# Altium PCB JacdacBreadboardRingsWasherG 109 oblong-panel.PcbDoc
Units mm, origin at the board's own origin, x right, y up, seen from the top; angles counter-clockwise.
Board outline 71 x 72 mm, 2 copper layers (Top Layer, Bottom Layer), stack 1.971 mm thick; 4 components, 0 nets, 4 pads, 0 vias.
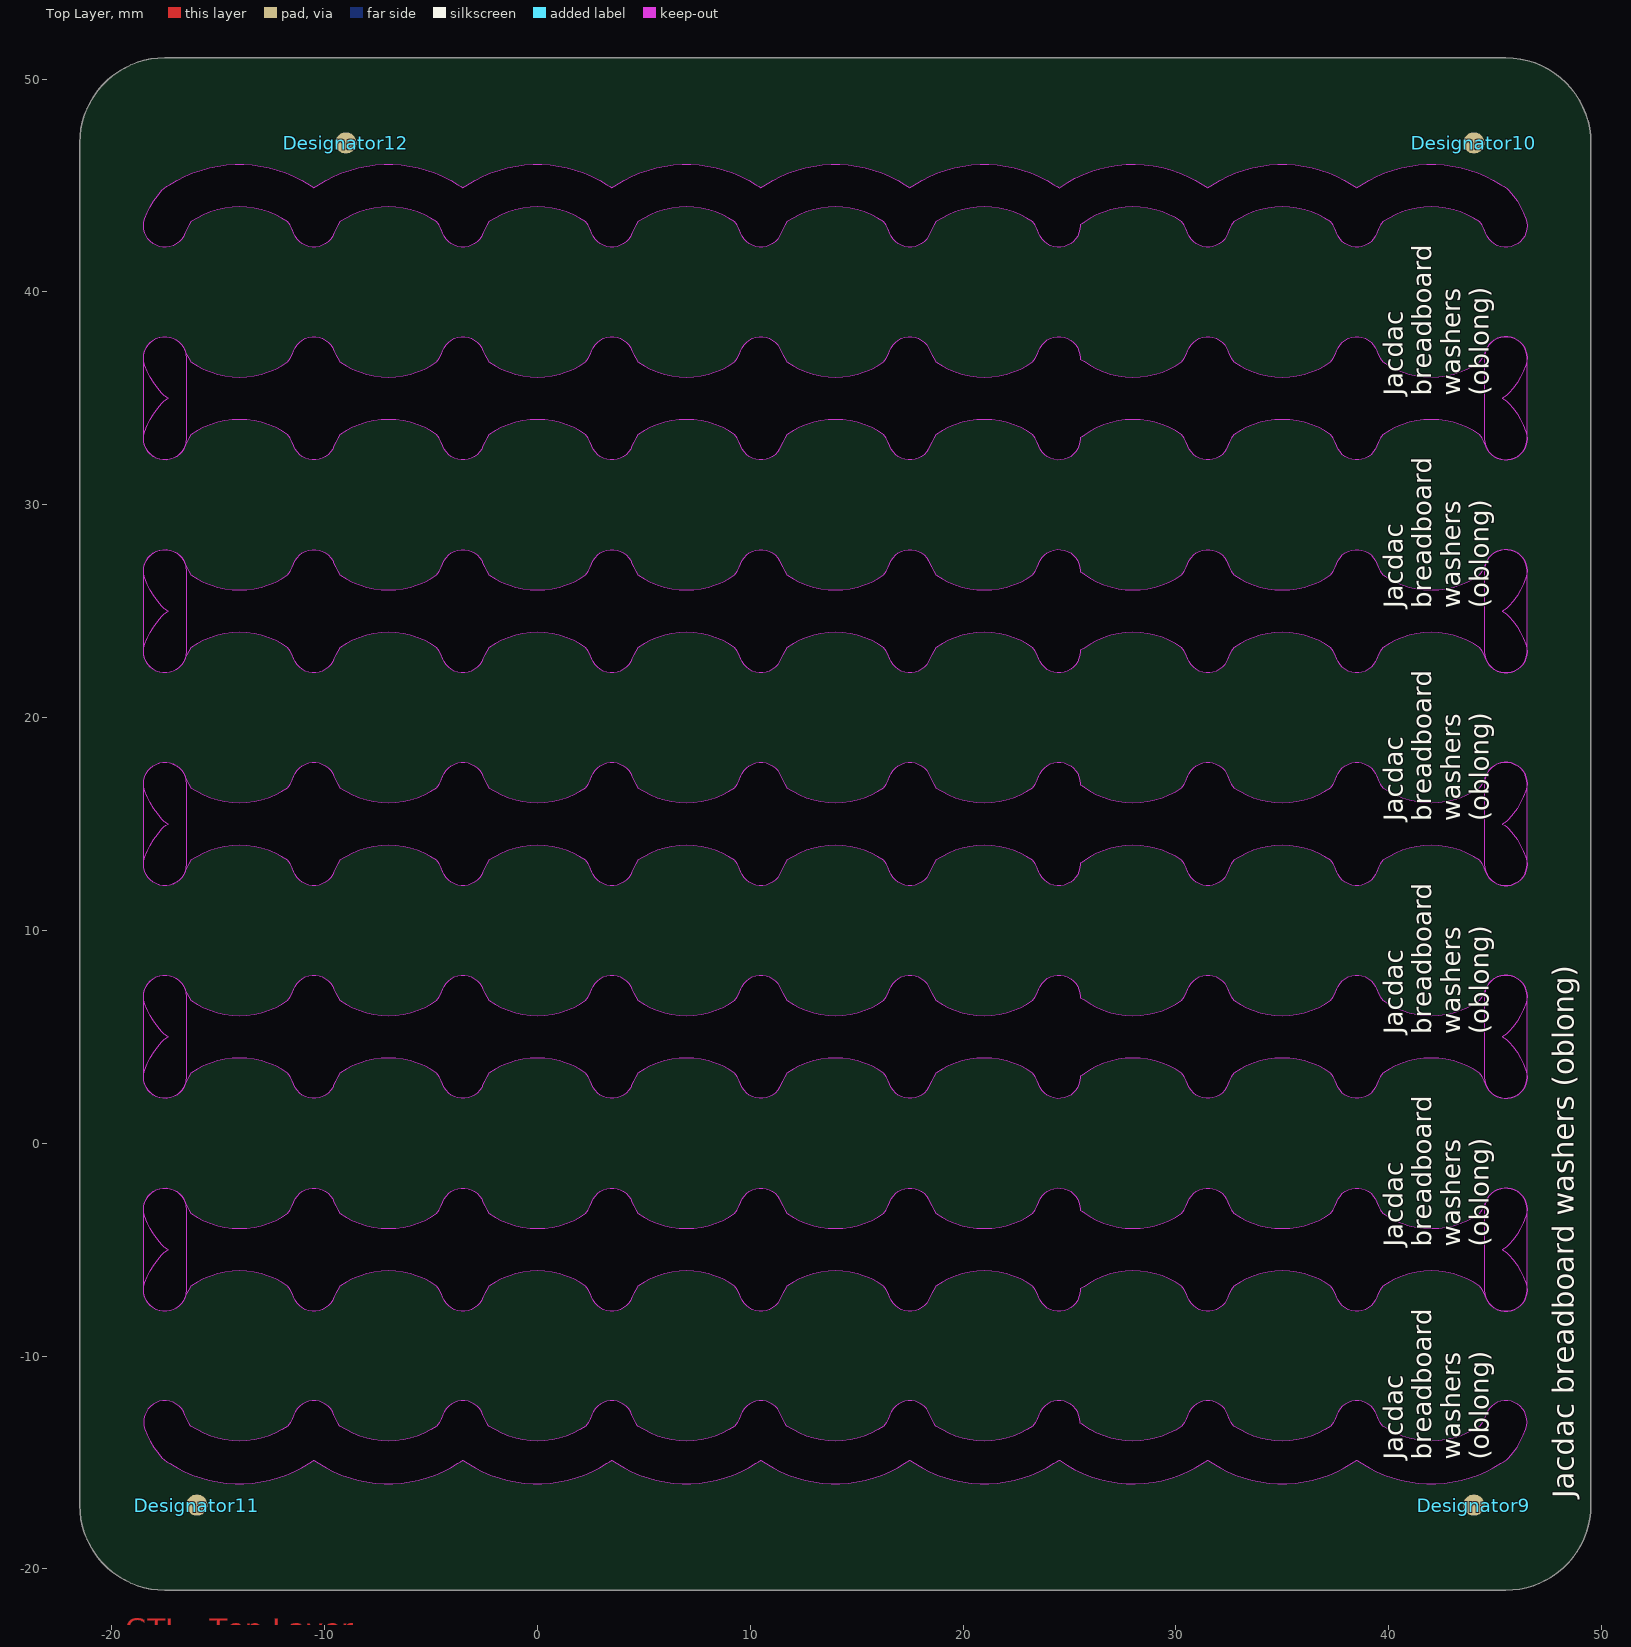
[diagram p0: Top Layer view]
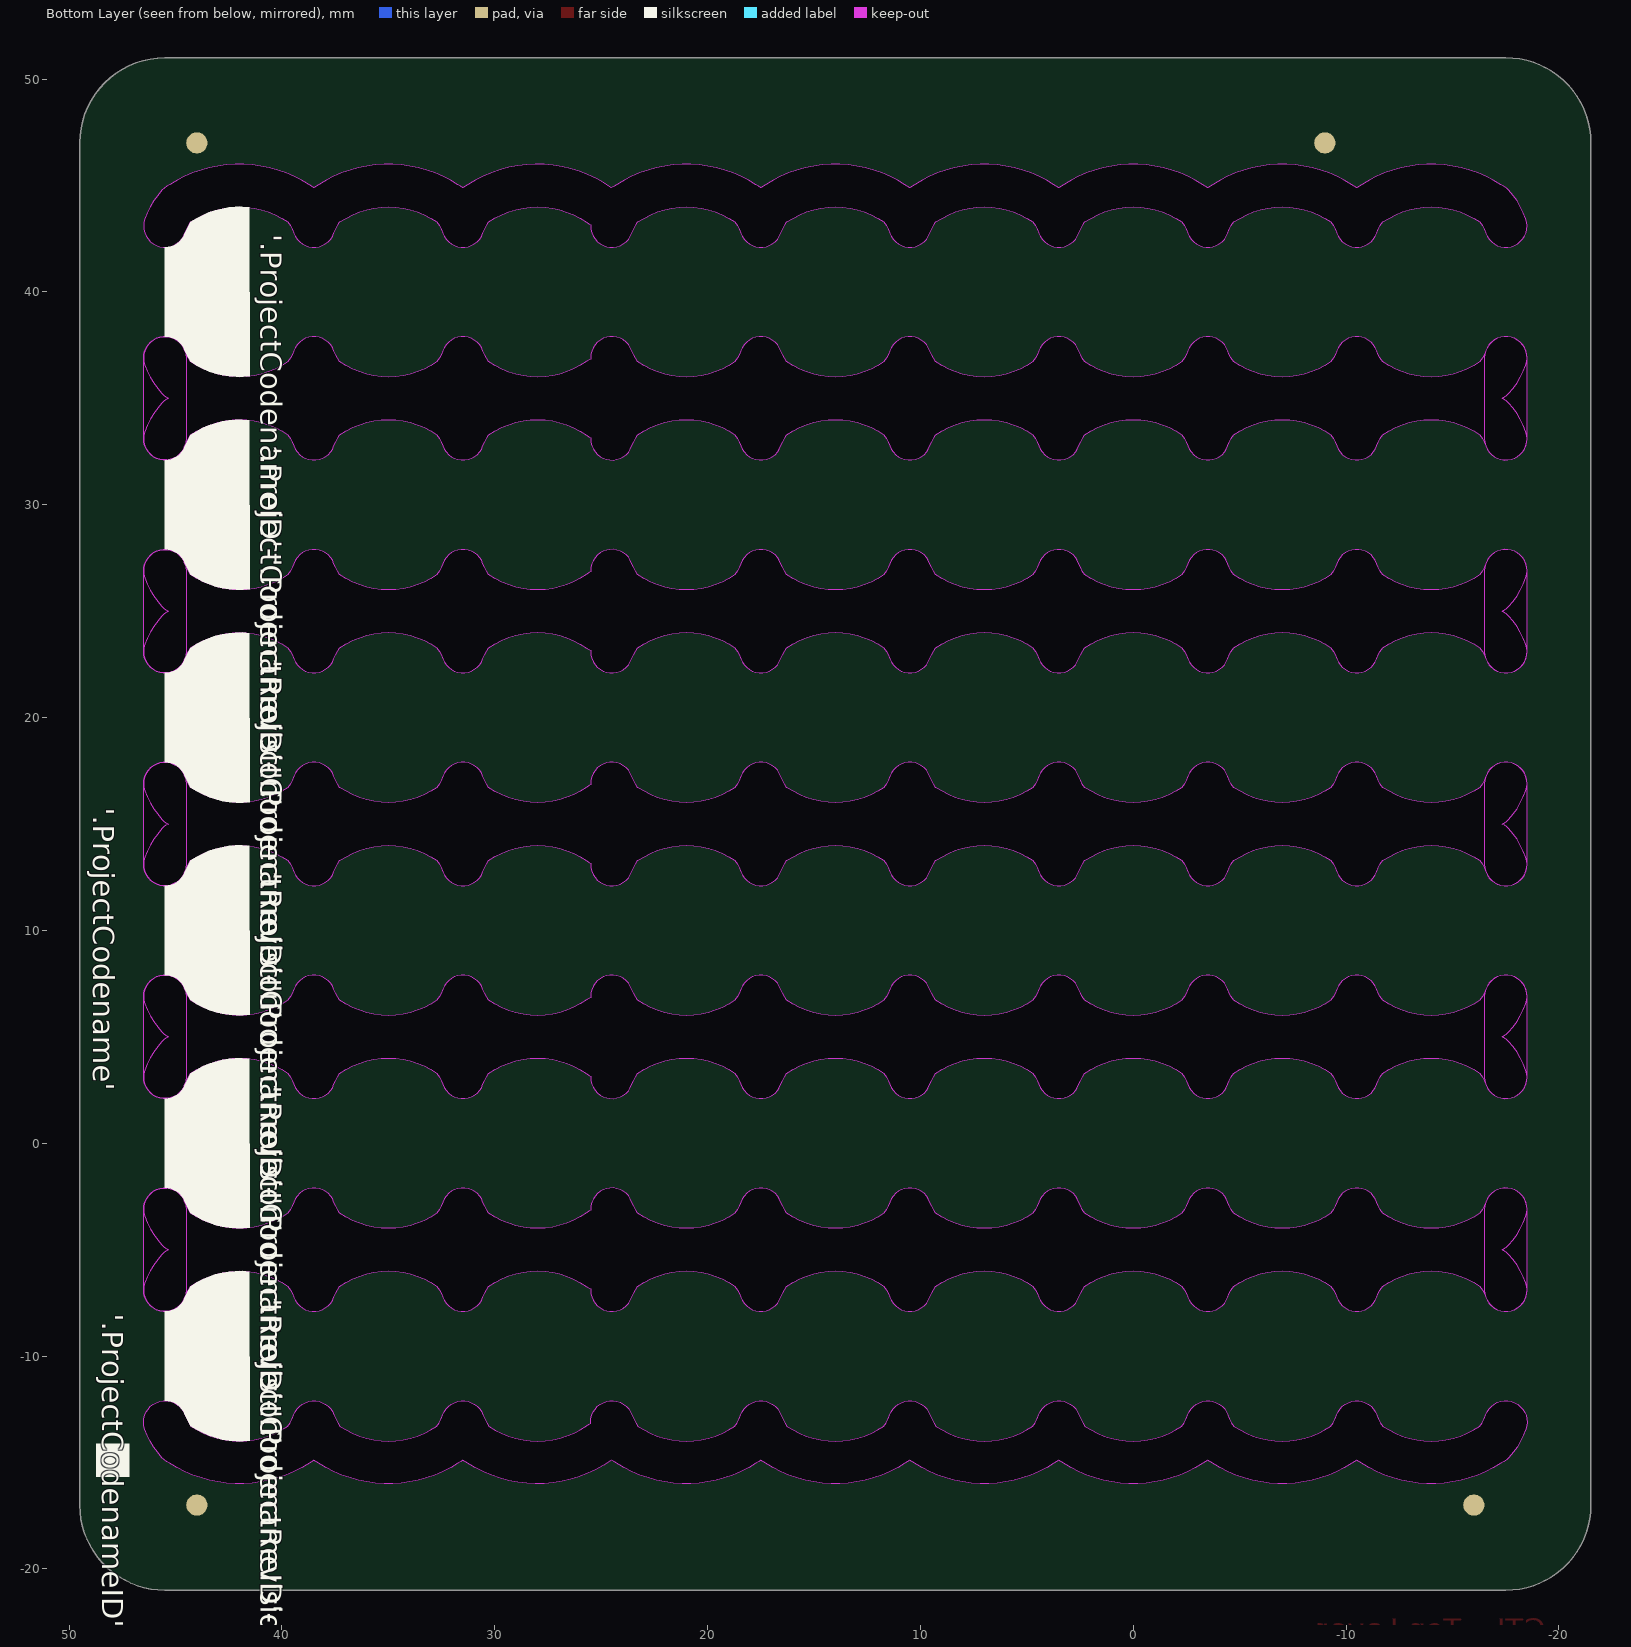
[diagram p1: Bottom Layer view, seen from below]

## Layer stack, top to bottom
Top Solder: solder mask 0.0102, Solder Resist, Dk 3.5
Top Layer: signal copper 0.0356
Dielectric 1: dielectric 1.9, FR-4, Dk 4.8
Bottom Layer: signal copper 0.0356
Bottom Solder: solder mask 0.0102, Solder Resist, Dk 3.5

## Board outline
-21.5,-17 -21.5,47 cw(c-17.5,47) -17.5,51 45.5,51 cw(c45.5,47) 49.5,47 49.5,-17 cw(c45.5,-17) 45.5,-21 -17.5,-21 cw(c-17.5,-17)
cut-out: -17.27,45.031 cw(c-14,40) -10.73,45.031 cw(c-11.097,44.1) -10.5,44.903 cw(c-9.903,44.1) -10.27,45.031 cw(c-7,40) -3.73,45.031 cw(c-4.097,44.1) -3.5,44.903 cw(c-2.903,44.1) -3.27,45.031 cw(c0,40) 3.27,45.031 cw(c2.903,44.1) 3.5,44.903 cw(c4.097,44.1) 3.73,45.031 cw(c7,40) 10.27,45.031 cw(c9.903,44.1) 10.5,44.903 cw(c11.097,44.1) 10.73,45.031 cw(c14,40) 17.27,45.031 cw(c16.903,44.1) 17.5,44.903 cw(c18.097,44.1) 17.73,45.031 cw(c21,40) 24.27,45.031 cw(c23.903,44.1) 24.52,44.888 24.533,44.897 cw(c28,40) 31.27,45.031 cw(c30.903,44.1) 31.5,44.903 cw(c32.097,44.1) 31.73,45.031 cw(c35,40) 38.27,45.031 cw(c37.903,44.1) 38.5,44.903 cw(c39.097,44.1) 38.73,45.031 cw(c42,40) 45.27,45.031 cw(c44.903,44.1) 45.647,44.77 cw(c42.674,42.093) 46.442,43.436 cw(c45.5,43.1) 46.5,43.1 cw(c45.5,43.1) 44.558,42.764 ccw(c42.674,42.093) 44.277,43.288 ccw(c42,40) 39.723,43.288 ccw(c41.326,42.093) 39.442,42.764 cw(c38.5,43.1) 37.558,42.764 ccw(c35.674,42.093) 37.277,43.288 ccw(c35,40) 32.723,43.288 ccw(c34.326,42.093) 32.442,42.764 cw(c31.5,43.1) 30.558,42.764 ccw(c28.674,42.093) 30.277,43.288 ccw(c28,40) 25.689,43.264 cw(c25.111,44.08) 25.499,43.159 25.5,43.1 cw(c24.5,43.1) 23.558,42.764 ccw(c21.674,42.093) 23.277,43.288 ccw(c21,40) 18.723,43.288 ccw(c20.326,42.093) 18.442,42.764 cw(c17.5,43.1) 16.558,42.764 ccw(c14.674,42.093) 16.277,43.288 ccw(c14,40) 11.723,43.288 ccw(c13.326,42.093) 11.442,42.764 cw(c10.5,43.1) 9.558,42.764 ccw(c7.674,42.093) 9.277,43.288 ccw(c7,40) 4.723,43.288 ccw(c6.326,42.093) 4.442,42.764 cw(c3.5,43.1) 2.558,42.764 ccw(c0.674,42.093) 2.277,43.288 ccw(c0,40) -2.277,43.288 ccw(c-0.674,42.093) -2.558,42.764 cw(c-3.5,43.1) -4.442,42.764 ccw(c-6.326,42.093) -4.723,43.288 ccw(c-7,40) -9.277,43.288 ccw(c-7.674,42.093) -9.558,42.764 cw(c-10.5,43.1) -11.442,42.764 ccw(c-13.326,42.093) -11.723,43.288 ccw(c-14,40) -16.277,43.288 ccw(c-14.674,42.093) -16.558,42.764 cw(c-17.5,43.1) -18.442,43.436 cw(c-14.674,42.093) -17.647,44.77 cw(c-16.903,44.1)
cut-out: -18.5,33.1 -18.5,36.9 cw(c-17.5,36.9) -16.5,36.9 -16.5,33.1 cw(c-17.5,33.1)
cut-out: 46.5,33.1 46.5,36.9 ccw(c45.5,36.9) 44.499,36.9 44.499,33.1 ccw(c45.5,33.1)
cut-out: -11.442,32.764 ccw(c-13.326,32.093) -11.723,33.288 ccw(c-14,30) -16.277,33.288 ccw(c-14.674,32.093) -16.558,32.764 cw(c-17.5,33.1) -18.442,33.436 cw(c-14.674,32.093) -17.647,34.77 cw(c-16.903,34.1) -17.341,35 cw(c-16.903,35.9) -17.647,35.23 cw(c-14.674,37.907) -18.442,36.564 cw(c-17.5,36.9) -16.558,37.236 ccw(c-14.674,37.907) -16.277,36.712 ccw(c-14,40) -11.723,36.712 ccw(c-13.326,37.907) -11.442,37.236 cw(c-10.5,36.9) -9.558,37.236 ccw(c-7.674,37.907) -9.277,36.712 ccw(c-7,40) -4.723,36.712 ccw(c-6.326,37.907) -4.442,37.236 cw(c-3.5,36.9) -2.558,37.236 ccw(c-0.674,37.907) -2.277,36.712 ccw(c0,40) 2.277,36.712 ccw(c0.674,37.907) 2.558,37.236 cw(c3.5,36.9) 4.442,37.236 ccw(c6.326,37.907) 4.723,36.712 ccw(c7,40) 9.277,36.712 ccw(c7.674,37.907) 9.558,37.236 cw(c10.5,36.9) 11.442,37.236 ccw(c13.326,37.907) 11.723,36.712 ccw(c14,40) 16.277,36.712 ccw(c14.674,37.907) 16.558,37.236 cw(c17.5,36.9) 18.442,37.236 ccw(c20.326,37.907) 18.723,36.712 ccw(c21,40) 23.277,36.712 ccw(c21.674,37.907) 23.558,37.236 cw(c24.5,36.9) 25.5,36.9 25.499,36.841 cw(c25.111,35.92) 25.689,36.736 ccw(c28,40) 30.277,36.712 ccw(c28.674,37.907) 30.558,37.236 cw(c31.5,36.9) 32.442,37.236 ccw(c34.326,37.907) 32.723,36.712 ccw(c35,40) 37.277,36.712 ccw(c35.674,37.907) 37.558,37.236 cw(c38.5,36.9) 39.442,37.236 ccw(c41.326,37.907) 39.723,36.712 ccw(c42,40) 44.277,36.712 ccw(c42.674,37.907) 44.558,37.236 cw(c45.5,36.9) 46.5,36.9 cw(c45.5,36.9) 46.442,36.564 cw(c42.674,37.907) 45.647,35.23 cw(c44.903,35.9) 45.341,35 cw(c44.903,34.1) 45.647,34.77 cw(c42.674,32.093) 46.442,33.436 cw(c45.5,33.1) 46.5,33.1 cw(c45.5,33.1) 44.558,32.764 ccw(c42.674,32.093) 44.277,33.288 ccw(c42,30) 39.723,33.288 ccw(c41.326,32.093) 39.442,32.764 cw(c38.5,33.1) 37.558,32.764 ccw(c35.674,32.093) 37.277,33.288 ccw(c35,30) 32.723,33.288 ccw(c34.326,32.093) 32.442,32.764 cw(c31.5,33.1) 30.558,32.764 ccw(c28.674,32.093) 30.277,33.288 ccw(c28,30) 25.689,33.264 cw(c25.111,34.081) 25.499,33.159 25.5,33.1 cw(c24.5,33.1) 23.558,32.764 ccw(c21.674,32.093) 23.277,33.288 ccw(c21,30) 18.723,33.288 ccw(c20.326,32.093) 18.442,32.764 cw(c17.5,33.1) 16.558,32.764 ccw(c14.674,32.093) 16.277,33.288 ccw(c14,30) 11.723,33.288 ccw(c13.326,32.093) 11.442,32.764 cw(c10.5,33.1) 9.558,32.764 ccw(c7.674,32.093) 9.277,33.288 ccw(c7,30) 4.723,33.288 ccw(c6.326,32.093) 4.442,32.764 cw(c3.5,33.1) 2.558,32.764 ccw(c0.674,32.093) 2.277,33.288 ccw(c0,30) -2.277,33.288 ccw(c-0.674,32.093) -2.558,32.764 cw(c-3.5,33.1) -4.442,32.764 ccw(c-6.326,32.093) -4.723,33.288 ccw(c-7,30) -9.277,33.288 ccw(c-7.674,32.093) -9.558,32.764 cw(c-10.5,33.1)
cut-out: -18.5,13.1 -18.5,16.9 cw(c-17.5,16.9) -16.5,16.9 -16.5,13.1 cw(c-17.5,13.1)
cut-out: -18.5,23.1 -18.5,26.9 cw(c-17.5,26.9) -16.5,26.9 -16.5,23.1 cw(c-17.5,23.1)
cut-out: 46.5,23.1 46.5,26.9 ccw(c45.5,26.9) 44.499,26.9 44.499,23.1 ccw(c45.5,23.1)
cut-out: 46.5,13.1 46.5,16.9 ccw(c45.5,16.9) 44.499,16.9 44.499,13.1 ccw(c45.5,13.1)
cut-out: -11.442,12.764 ccw(c-13.326,12.093) -11.723,13.288 ccw(c-14,10) -16.277,13.288 ccw(c-14.674,12.093) -16.558,12.764 cw(c-17.5,13.1) -18.442,13.436 cw(c-14.674,12.093) -17.647,14.77 cw(c-16.903,14.1) -17.341,15 cw(c-16.903,15.9) -17.647,15.23 cw(c-14.674,17.907) -18.442,16.564 cw(c-17.5,16.9) -16.558,17.236 ccw(c-14.674,17.907) -16.277,16.712 ccw(c-14,20) -11.723,16.712 ccw(c-13.326,17.907) -11.442,17.236 cw(c-10.5,16.9) -9.558,17.236 ccw(c-7.674,17.907) -9.277,16.712 ccw(c-7,20) -4.723,16.712 ccw(c-6.326,17.907) -4.442,17.236 cw(c-3.5,16.9) -2.558,17.236 ccw(c-0.674,17.907) -2.277,16.712 ccw(c0,20) 2.277,16.712 ccw(c0.674,17.907) 2.558,17.236 cw(c3.5,16.9) 4.442,17.236 ccw(c6.326,17.907) 4.723,16.712 ccw(c7,20) 9.277,16.712 ccw(c7.674,17.907) 9.558,17.236 cw(c10.5,16.9) 11.442,17.236 ccw(c13.326,17.907) 11.723,16.712 ccw(c14,20) 16.277,16.712 ccw(c14.674,17.907) 16.558,17.236 cw(c17.5,16.9) 18.442,17.236 ccw(c20.326,17.907) 18.723,16.712 ccw(c21,20) 23.277,16.712 ccw(c21.674,17.907) 23.558,17.236 cw(c24.5,16.9) 25.5,16.9 25.499,16.841 cw(c25.111,15.92) 25.689,16.736 ccw(c28,20) 30.277,16.712 ccw(c28.674,17.907) 30.558,17.236 cw(c31.5,16.9) 32.442,17.236 ccw(c34.326,17.907) 32.723,16.712 ccw(c35,20) 37.277,16.712 ccw(c35.674,17.907) 37.558,17.236 cw(c38.5,16.9) 39.442,17.236 ccw(c41.326,17.907) 39.723,16.712 ccw(c42,20) 44.277,16.712 ccw(c42.674,17.907) 44.558,17.236 cw(c45.5,16.9) 46.5,16.9 cw(c45.5,16.9) 46.442,16.564 cw(c42.674,17.907) 45.647,15.23 cw(c44.903,15.9) 45.341,15 cw(c44.903,14.1) 45.647,14.77 cw(c42.674,12.093) 46.442,13.436 cw(c45.5,13.1) 46.5,13.1 cw(c45.5,13.1) 44.558,12.764 ccw(c42.674,12.093) 44.277,13.288 ccw(c42,10) 39.723,13.288 ccw(c41.326,12.093) 39.442,12.764 cw(c38.5,13.1) 37.558,12.764 ccw(c35.674,12.093) 37.277,13.288 ccw(c35,10) 32.723,13.288 ccw(c34.326,12.093) 32.442,12.764 cw(c31.5,13.1) 30.558,12.764 ccw(c28.674,12.093) 30.277,13.288 ccw(c28,10) 25.689,13.264 cw(c25.111,14.081) 25.499,13.159 25.5,13.1 cw(c24.5,13.1) 23.558,12.764 ccw(c21.674,12.093) 23.277,13.288 ccw(c21,10) 18.723,13.288 ccw(c20.326,12.093) 18.442,12.764 cw(c17.5,13.1) 16.558,12.764 ccw(c14.674,12.093) 16.277,13.288 ccw(c14,10) 11.723,13.288 ccw(c13.326,12.093) 11.442,12.764 cw(c10.5,13.1) 9.558,12.764 ccw(c7.674,12.093) 9.277,13.288 ccw(c7,10) 4.723,13.288 ccw(c6.326,12.093) 4.442,12.764 cw(c3.5,13.1) 2.558,12.764 ccw(c0.674,12.093) 2.277,13.288 ccw(c0,10) -2.277,13.288 ccw(c-0.674,12.093) -2.558,12.764 cw(c-3.5,13.1) -4.442,12.764 ccw(c-6.326,12.093) -4.723,13.288 ccw(c-7,10) -9.277,13.288 ccw(c-7.674,12.093) -9.558,12.764 cw(c-10.5,13.1)
cut-out: -11.442,22.764 ccw(c-13.326,22.093) -11.723,23.288 ccw(c-14,20) -16.277,23.288 ccw(c-14.674,22.093) -16.558,22.764 cw(c-17.5,23.1) -18.442,23.436 cw(c-14.674,22.093) -17.647,24.77 cw(c-16.903,24.1) -17.341,25 cw(c-16.903,25.9) -17.647,25.23 cw(c-14.674,27.907) -18.442,26.564 cw(c-17.5,26.9) -16.558,27.236 ccw(c-14.674,27.907) -16.277,26.712 ccw(c-14,30) -11.723,26.712 ccw(c-13.326,27.907) -11.442,27.236 cw(c-10.5,26.9) -9.558,27.236 ccw(c-7.674,27.907) -9.277,26.712 ccw(c-7,30) -4.723,26.712 ccw(c-6.326,27.907) -4.442,27.236 cw(c-3.5,26.9) -2.558,27.236 ccw(c-0.674,27.907) -2.277,26.712 ccw(c0,30) 2.277,26.712 ccw(c0.674,27.907) 2.558,27.236 cw(c3.5,26.9) 4.442,27.236 ccw(c6.326,27.907) 4.723,26.712 ccw(c7,30) 9.277,26.712 ccw(c7.674,27.907) 9.558,27.236 cw(c10.5,26.9) 11.442,27.236 ccw(c13.326,27.907) 11.723,26.712 ccw(c14,30) 16.277,26.712 ccw(c14.674,27.907) 16.558,27.236 cw(c17.5,26.9) 18.442,27.236 ccw(c20.326,27.907) 18.723,26.712 ccw(c21,30) 23.277,26.712 ccw(c21.674,27.907) 23.558,27.236 cw(c24.5,26.9) 25.5,26.9 25.499,26.841 cw(c25.111,25.92) 25.689,26.736 ccw(c28,30) 30.277,26.712 ccw(c28.674,27.907) 30.558,27.236 cw(c31.5,26.9) 32.442,27.236 ccw(c34.326,27.907) 32.723,26.712 ccw(c35,30) 37.277,26.712 ccw(c35.674,27.907) 37.558,27.236 cw(c38.5,26.9) 39.442,27.236 ccw(c41.326,27.907) 39.723,26.712 ccw(c42,30) 44.277,26.712 ccw(c42.674,27.907) 44.558,27.236 cw(c45.5,26.9) 46.5,26.9 cw(c45.5,26.9) 46.442,26.564 cw(c42.674,27.907) 45.647,25.23 cw(c44.903,25.9) 45.341,25 cw(c44.903,24.1) 45.647,24.77 cw(c42.674,22.093) 46.442,23.436 cw(c45.5,23.1) 46.5,23.1 cw(c45.5,23.1) 44.558,22.764 ccw(c42.674,22.093) 44.277,23.288 ccw(c42,20) 39.723,23.288 ccw(c41.326,22.093) 39.442,22.764 cw(c38.5,23.1) 37.558,22.764 ccw(c35.674,22.093) 37.277,23.288 ccw(c35,20) 32.723,23.288 ccw(c34.326,22.093) 32.442,22.764 cw(c31.5,23.1) 30.558,22.764 ccw(c28.674,22.093) 30.277,23.288 ccw(c28,20) 25.689,23.264 cw(c25.111,24.081) 25.499,23.159 25.5,23.1 cw(c24.5,23.1) 23.558,22.764 ccw(c21.674,22.093) 23.277,23.288 ccw(c21,20) 18.723,23.288 ccw(c20.326,22.093) 18.442,22.764 cw(c17.5,23.1) 16.558,22.764 ccw(c14.674,22.093) 16.277,23.288 ccw(c14,20) 11.723,23.288 ccw(c13.326,22.093) 11.442,22.764 cw(c10.5,23.1) 9.558,22.764 ccw(c7.674,22.093) 9.277,23.288 ccw(c7,20) 4.723,23.288 ccw(c6.326,22.093) 4.442,22.764 cw(c3.5,23.1) 2.558,22.764 ccw(c0.674,22.093) 2.277,23.288 ccw(c0,20) -2.277,23.288 ccw(c-0.674,22.093) -2.558,22.764 cw(c-3.5,23.1) -4.442,22.764 ccw(c-6.326,22.093) -4.723,23.288 ccw(c-7,20) -9.277,23.288 ccw(c-7.674,22.093) -9.558,22.764 cw(c-10.5,23.1)
cut-out: -11.442,2.764 ccw(c-13.326,2.093) -11.723,3.288 ccw(c-14,0) -16.277,3.288 ccw(c-14.674,2.093) -16.558,2.764 cw(c-17.5,3.1) -18.442,3.436 cw(c-14.674,2.093) -17.647,4.77 cw(c-16.903,4.1) -17.341,5 cw(c-16.903,5.9) -17.647,5.23 cw(c-14.674,7.907) -18.442,6.564 cw(c-17.5,6.9) -16.558,7.236 ccw(c-14.674,7.907) -16.277,6.712 ccw(c-14,10) -11.723,6.712 ccw(c-13.326,7.907) -11.442,7.236 cw(c-10.5,6.9) -9.558,7.236 ccw(c-7.674,7.907) -9.277,6.712 ccw(c-7,10) -4.723,6.712 ccw(c-6.326,7.907) -4.442,7.236 cw(c-3.5,6.9) -2.558,7.236 ccw(c-0.674,7.907) -2.277,6.712 ccw(c0,10) 2.277,6.712 ccw(c0.674,7.907) 2.558,7.236 cw(c3.5,6.9) 4.442,7.236 ccw(c6.326,7.907) 4.723,6.712 ccw(c7,10) 9.277,6.712 ccw(c7.674,7.907) 9.558,7.236 cw(c10.5,6.9) 11.442,7.236 ccw(c13.326,7.907) 11.723,6.712 ccw(c14,10) 16.277,6.712 ccw(c14.674,7.907) 16.558,7.236 cw(c17.5,6.9) 18.442,7.236 ccw(c20.326,7.907) 18.723,6.712 ccw(c21,10) 23.277,6.712 ccw(c21.674,7.907) 23.558,7.236 cw(c24.5,6.9) 25.5,6.9 25.499,6.841 cw(c25.111,5.92) 25.689,6.736 ccw(c28,10) 30.277,6.712 ccw(c28.674,7.907) 30.558,7.236 cw(c31.5,6.9) 32.442,7.236 ccw(c34.326,7.907) 32.723,6.712 ccw(c35,10) 37.277,6.712 ccw(c35.674,7.907) 37.558,7.236 cw(c38.5,6.9) 39.442,7.236 ccw(c41.326,7.907) 39.723,6.712 ccw(c42,10) 44.277,6.712 ccw(c42.674,7.907) 44.558,7.236 cw(c45.5,6.9) 46.5,6.9 cw(c45.5,6.9) 46.442,6.564 cw(c42.674,7.907) 45.647,5.23 cw(c44.903,5.9) 45.341,5 cw(c44.903,4.1) 45.647,4.77 cw(c42.674,2.093) 46.442,3.436 cw(c45.5,3.1) 46.5,3.1 cw(c45.5,3.1) 44.558,2.764 ccw(c42.674,2.093) 44.277,3.288 ccw(c42,0) 39.723,3.288 ccw(c41.326,2.093) 39.442,2.764 cw(c38.5,3.1) 37.558,2.764 ccw(c35.674,2.093) 37.277,3.288 ccw(c35,0) 32.723,3.288 ccw(c34.326,2.093) 32.442,2.764 cw(c31.5,3.1) 30.558,2.764 ccw(c28.674,2.093) 30.277,3.288 ccw(c28,0) 25.689,3.264 cw(c25.111,4.081) 25.499,3.159 25.5,3.1 cw(c24.5,3.1) 23.558,2.764 ccw(c21.674,2.093) 23.277,3.288 ccw(c21,0) 18.723,3.288 ccw(c20.326,2.093) 18.442,2.764 cw(c17.5,3.1) 16.558,2.764 ccw(c14.674,2.093) 16.277,3.288 ccw(c14,0) 11.723,3.288 ccw(c13.326,2.093) 11.442,2.764 cw(c10.5,3.1) 9.558,2.764 ccw(c7.674,2.093) 9.277,3.288 ccw(c7,0) 4.723,3.288 ccw(c6.326,2.093) 4.442,2.764 cw(c3.5,3.1) 2.558,2.764 ccw(c0.674,2.093) 2.277,3.288 ccw(c0,0) -2.277,3.288 ccw(c-0.674,2.093) -2.558,2.764 cw(c-3.5,3.1) -4.442,2.764 ccw(c-6.326,2.093) -4.723,3.288 ccw(c-7,0) -9.277,3.288 ccw(c-7.674,2.093) -9.558,2.764 cw(c-10.5,3.1)
cut-out: -11.442,-7.236 ccw(c-13.326,-7.907) -11.723,-6.712 ccw(c-14,-10) -16.277,-6.712 ccw(c-14.674,-7.907) -16.558,-7.236 cw(c-17.5,-6.9) -18.442,-6.564 cw(c-14.674,-7.907) -17.647,-5.23 cw(c-16.903,-5.9) -17.341,-5 cw(c-16.903,-4.1) -17.647,-4.77 cw(c-14.674,-2.093) -18.442,-3.436 cw(c-17.5,-3.1) -16.558,-2.764 ccw(c-14.674,-2.093) -16.277,-3.288 ccw(c-14,0) -11.723,-3.288 ccw(c-13.326,-2.093) -11.442,-2.764 cw(c-10.5,-3.1) -9.558,-2.764 ccw(c-7.674,-2.093) -9.277,-3.288 ccw(c-7,0) -4.723,-3.288 ccw(c-6.326,-2.093) -4.442,-2.764 cw(c-3.5,-3.1) -2.558,-2.764 ccw(c-0.674,-2.093) -2.277,-3.288 ccw(c0,0) 2.277,-3.288 ccw(c0.674,-2.093) 2.558,-2.764 cw(c3.5,-3.1) 4.442,-2.764 ccw(c6.326,-2.093) 4.723,-3.288 ccw(c7,0) 9.277,-3.288 ccw(c7.674,-2.093) 9.558,-2.764 cw(c10.5,-3.1) 11.442,-2.764 ccw(c13.326,-2.093) 11.723,-3.288 ccw(c14,0) 16.277,-3.288 ccw(c14.674,-2.093) 16.558,-2.764 cw(c17.5,-3.1) 18.442,-2.764 ccw(c20.326,-2.093) 18.723,-3.288 ccw(c21,0) 23.277,-3.288 ccw(c21.674,-2.093) 23.558,-2.764 cw(c24.5,-3.1) 25.5,-3.1 25.499,-3.159 cw(c25.111,-4.08) 25.689,-3.264 ccw(c28,0) 30.277,-3.288 ccw(c28.674,-2.093) 30.558,-2.764 cw(c31.5,-3.1) 32.442,-2.764 ccw(c34.326,-2.093) 32.723,-3.288 ccw(c35,0) 37.277,-3.288 ccw(c35.674,-2.093) 37.558,-2.764 cw(c38.5,-3.1) 39.442,-2.764 ccw(c41.326,-2.093) 39.723,-3.288 ccw(c42,0) 44.277,-3.288 ccw(c42.674,-2.093) 44.558,-2.764 cw(c45.5,-3.1) 46.5,-3.1 cw(c45.5,-3.1) 46.442,-3.436 cw(c42.674,-2.093) 45.647,-4.77 cw(c44.903,-4.1) 45.341,-5 cw(c44.903,-5.9) 45.647,-5.23 cw(c42.674,-7.907) 46.442,-6.564 cw(c45.5,-6.9) 46.5,-6.9 cw(c45.5,-6.9) 44.558,-7.236 ccw(c42.674,-7.907) 44.277,-6.712 ccw(c42,-10) 39.723,-6.712 ccw(c41.326,-7.907) 39.442,-7.236 cw(c38.5,-6.9) 37.558,-7.236 ccw(c35.674,-7.907) 37.277,-6.712 ccw(c35,-10) 32.723,-6.712 ccw(c34.326,-7.907) 32.442,-7.236 cw(c31.5,-6.9) 30.558,-7.236 ccw(c28.674,-7.907) 30.277,-6.712 ccw(c28,-10) 25.689,-6.736 cw(c25.111,-5.919) 25.499,-6.841 25.5,-6.9 cw(c24.5,-6.9) 23.558,-7.236 ccw(c21.674,-7.907) 23.277,-6.712 ccw(c21,-10) 18.723,-6.712 ccw(c20.326,-7.907) 18.442,-7.236 cw(c17.5,-6.9) 16.558,-7.236 ccw(c14.674,-7.907) 16.277,-6.712 ccw(c14,-10) 11.723,-6.712 ccw(c13.326,-7.907) 11.442,-7.236 cw(c10.5,-6.9) 9.558,-7.236 ccw(c7.674,-7.907) 9.277,-6.712 ccw(c7,-10) 4.723,-6.712 ccw(c6.326,-7.907) 4.442,-7.236 cw(c3.5,-6.9) 2.558,-7.236 ccw(c0.674,-7.907) 2.277,-6.712 ccw(c0,-10) -2.277,-6.712 ccw(c-0.674,-7.907) -2.558,-7.236 cw(c-3.5,-6.9) -4.442,-7.236 ccw(c-6.326,-7.907) -4.723,-6.712 ccw(c-7,-10) -9.277,-6.712 ccw(c-7.674,-7.907) -9.558,-7.236 cw(c-10.5,-6.9)
cut-out: -17.27,-15.031 ccw(c-14,-10) -10.73,-15.031 ccw(c-11.097,-14.1) -10.5,-14.903 ccw(c-9.903,-14.1) -10.27,-15.031 ccw(c-7,-10) -3.73,-15.031 ccw(c-4.097,-14.1) -3.5,-14.903 ccw(c-2.903,-14.1) -3.27,-15.031 ccw(c0,-10) 3.27,-15.031 ccw(c2.903,-14.1) 3.5,-14.903 ccw(c4.097,-14.1) 3.73,-15.031 ccw(c7,-10) 10.27,-15.031 ccw(c9.903,-14.1) 10.5,-14.903 ccw(c11.097,-14.1) 10.73,-15.031 ccw(c14,-10) 17.27,-15.031 ccw(c16.903,-14.1) 17.5,-14.903 ccw(c18.097,-14.1) 17.73,-15.031 ccw(c21,-10) 24.27,-15.031 ccw(c23.903,-14.1) 24.52,-14.888 24.533,-14.897 ccw(c28,-10) 31.27,-15.031 ccw(c30.903,-14.1) 31.5,-14.903 ccw(c32.097,-14.1) 31.73,-15.031 ccw(c35,-10) 38.27,-15.031 ccw(c37.903,-14.1) 38.5,-14.903 ccw(c39.097,-14.1) 38.73,-15.031 ccw(c42,-10) 45.27,-15.031 ccw(c44.903,-14.1) 45.647,-14.77 ccw(c42.674,-12.093) 46.442,-13.436 ccw(c45.5,-13.1) 46.5,-13.1 ccw(c45.5,-13.1) 44.558,-12.764 cw(c42.674,-12.093) 44.277,-13.288 cw(c42,-10) 39.723,-13.288 cw(c41.326,-12.093) 39.442,-12.764 ccw(c38.5,-13.1) 37.558,-12.764 cw(c35.674,-12.093) 37.277,-13.288 cw(c35,-10) 32.723,-13.288 cw(c34.326,-12.093) 32.442,-12.764 ccw(c31.5,-13.1) 30.558,-12.764 cw(c28.674,-12.093) 30.277,-13.288 cw(c28,-10) 25.689,-13.264 ccw(c25.111,-14.08) 25.499,-13.159 25.5,-13.1 ccw(c24.5,-13.1) 23.558,-12.764 cw(c21.674,-12.093) 23.277,-13.288 cw(c21,-10) 18.723,-13.288 cw(c20.326,-12.093) 18.442,-12.764 ccw(c17.5,-13.1) 16.558,-12.764 cw(c14.674,-12.093) 16.277,-13.288 cw(c14,-10) 11.723,-13.288 cw(c13.326,-12.093) 11.442,-12.764 ccw(c10.5,-13.1) 9.558,-12.764 cw(c7.674,-12.093) 9.277,-13.288 cw(c7,-10) 4.723,-13.288 cw(c6.326,-12.093) 4.442,-12.764 ccw(c3.5,-13.1) 2.558,-12.764 cw(c0.674,-12.093) 2.277,-13.288 cw(c0,-10) -2.277,-13.288 cw(c-0.674,-12.093) -2.558,-12.764 ccw(c-3.5,-13.1) -4.442,-12.764 cw(c-6.326,-12.093) -4.723,-13.288 cw(c-7,-10) -9.277,-13.288 cw(c-7.674,-12.093) -9.558,-12.764 ccw(c-10.5,-13.1) -11.442,-12.764 cw(c-13.326,-12.093) -11.723,-13.288 cw(c-14,-10) -16.277,-13.288 cw(c-14.674,-12.093) -16.558,-12.764 ccw(c-17.5,-13.1) -18.442,-13.436 ccw(c-14.674,-12.093) -17.647,-14.77 ccw(c-16.903,-14.1)
cut-out: 46.5,-6.9 46.5,-3.1 ccw(c45.5,-3.1) 44.499,-3.1 44.499,-6.9 ccw(c45.5,-6.9)
cut-out: 46.5,3.1 46.5,6.9 ccw(c45.5,6.9) 44.499,6.9 44.499,3.1 ccw(c45.5,3.1)
cut-out: -18.5,3.1 -18.5,6.9 cw(c-17.5,6.9) -16.5,6.9 -16.5,3.1 cw(c-17.5,3.1)
cut-out: -18.5,-6.9 -18.5,-3.1 cw(c-17.5,-3.1) -16.5,-3.1 -16.5,-6.9 cw(c-17.5,-6.9)

## Design rules (kind name [scope] priority, off if disabled: settings)
Clearance [All] p1: gap=0.254 ignorepadtopadclearanceinfootprint=FALSE except(0: Arc-Hole Track-Hole SMDPad-Hole THPad-Hole Via-Hole Fill-Hole Poly-Hole Region-Hole Text-Hole)
PolygonConnect [All] p1: connectstyle=Relief reliefconductorwidth=0.254 reliefentries=4 polygonreliefangle="90 Angle" airgapwidth=0.254
RoutingVias [All] p1: holewidth=0.711 width=1.27 viastyle="Through Hole" minholewidth=0.711 minwidth=1.27 maxholewidth=0.711 maxwidth=1.27
SolderMaskExpansion [All] p1: expansion=0.102 istentingtop=FALSE
Width [All] p1: maxlimit=0.254 minlimit=0.254 preferedwidth=0.254
30 further rules are at their usual default settings.

## Components (designator, comment, footprint, x,y, rotation, side; value= is the part's Value field where it differs from the comment)
Designator9 "Comment" "Pad1mm soldermask2mm doublesided" 44,-17 r0 top
Designator10 "Comment" "Pad1mm soldermask2mm doublesided" 44,47 r0 top
Designator11 "Comment" "Pad1mm soldermask2mm doublesided" -16,-17 r180 top
Designator12 "Comment" "Pad1mm soldermask2mm doublesided" -9,47 r180 top

## Footprints (in the part's own frame and the unit in brackets; to place one, negate y for a bottom-side part, rotate by r counter-clockwise, add the part's x,y. Pads: shape width x height; smd on the part's side, far side on the other; paste and mask are expansions set on the pad)
"Pad1mm soldermask2mm doublesided" [mm] "Testpoint/fiducial pad 1mm diameter with 2mm diameter soldermask"
  round 1 all layers, no hole paste-1 mask+0.5: 1(0,0)

## Nets (pads, with @x,y where several pads share a name; then routed paths per layer and width w, separated by ;. In a path a pad name is that pad's centre, name@x,y a point inside that pad or via, vN(x,y) a via of type N, cw(c..) or ccw(c..) an arc to the next point about the centre after c; other vN are vias at no path point)
pads on no net: Designator9.1 Designator10.1 Designator11.1 Designator12.1

## Other copper
Top Layer:
  text "GTL - Top Layer" at -19.372,-23.651 h1.7
Bottom Layer:
  text "GBL - Bottom Layer" at -19.372,-25.151 h1.7

## Silkscreen, mask and mechanical layers (free items; w line width, h text height)
Top Overlay:
  text "Jacdac / breadboard / washers / (oblong)" at 44.7,35.129 h0.9 r90
  text "Jacdac / breadboard / washers / (oblong)" at 44.7,25.129 h0.9 r90
  text "Jacdac / breadboard / washers / (oblong)" at 44.7,15.129 h0.9 r90
  text "Jacdac / breadboard / washers / (oblong)" at 44.7,5.129 h0.9 r90
  text "Jacdac / breadboard / washers / (oblong)" at 44.7,-4.871 h0.9 r90
  text "Jacdac / breadboard / washers / (oblong)" at 44.7,-14.871 h0.9 r90
  text "Jacdac breadboard washers (oblong)" at 48.7,-16.687 h1 r90
  text "GTO - Top Overlay" at -3.872,-26.687 h1.7
Bottom Overlay:
  region: 48.75,-15.675 48.75,-14.1 47.158,-14.1 47.158,-15.675
  region: 41.505,36.031 41.546,43.974 cw(c42,40) 44.278,43.288 cw(c42.674,42.093) 44.56,42.758 ccw(c45.5,43.1) 45.5,42.1 45.5,37.9 ccw(c45.5,36.9) 44.56,37.242 cw(c42.674,37.907) 44.278,36.712 cw(c42,40)
  region: 41.505,26.031 41.546,33.974 cw(c42,30) 44.278,33.288 cw(c42.674,32.093) 44.56,32.758 ccw(c45.5,33.1) 45.5,32.1 45.5,27.9 ccw(c45.5,26.9) 44.56,27.242 cw(c42.674,27.907) 44.278,26.712 cw(c42,30)
  region: 41.505,16.031 41.546,23.974 cw(c42,20) 44.278,23.288 cw(c42.674,22.093) 44.56,22.758 ccw(c45.5,23.1) 45.5,22.1 45.5,17.9 ccw(c45.5,16.9) 44.56,17.242 cw(c42.674,17.907) 44.278,16.712 cw(c42,20)
  region: 41.505,6.031 41.546,13.974 cw(c42,10) 44.278,13.288 cw(c42.674,12.093) 44.56,12.758 ccw(c45.5,13.1) 45.5,12.1 45.5,7.9 ccw(c45.5,6.9) 44.56,7.242 cw(c42.674,7.907) 44.278,6.712 cw(c42,10)
  region: 41.505,-3.969 41.546,3.974 cw(c42,0) 44.278,3.288 cw(c42.674,2.093) 44.56,2.758 ccw(c45.5,3.1) 45.5,2.1 45.5,-2.1 ccw(c45.5,-3.1) 44.56,-2.758 cw(c42.674,-2.093) 44.278,-3.288 cw(c42,0)
  region: 41.505,-13.969 41.546,-6.026 cw(c42,-10) 44.278,-6.712 cw(c42.674,-7.907) 44.56,-7.242 ccw(c45.5,-6.9) 45.5,-7.9 45.5,-12.1 ccw(c45.5,-13.1) 44.56,-12.758 cw(c42.674,-12.093) 44.278,-13.288 cw(c42,-10)
  text "'.ProjectCodenameID'-'.ProjectRevision'" at 41,42.702 h1 r90
  text "'.ProjectCodenameID'-'.ProjectRevision'" at 41,32.702 h1 r90
  text "'.ProjectCodenameID'-'.ProjectRevision'" at 41,22.702 h1 r90
  text "'.ProjectCodename'" at 48.875,15.752 h1 r90
  text "'.ProjectCodenameID'-'.ProjectRevision'" at 41,12.702 h1 r90
  text "'.ProjectCodenameID'-'.ProjectRevision'" at 41,2.702 h1 r90
  text "'.ProjectCodenameID'-'.ProjectRevision'" at 41,-7.298 h1 r90
  text "'.ProjectCodenameID'-'.ProjectRevision'" at 48.45,-8 h1 r90
  text "GBO - Bottom Overlay" at -3.872,-28.187 h1.7
Top Paste:
  text "GTP - Top Paste" at 10.328,-23.651 h1.7
Bottom Paste:
  text "GBP - Bottom Paste" at 10.328,-25.151 h1.7
Top Solder:
  text "GTS - Top Solder (resist)" at 10.328,-26.687 h1.7
Bottom Solder:
  text "GBS - Bottom Solder (resist)" at 10.328,-28.187 h1.7
[3] Fabrication Notes:
  text "Notes:" at 27.5,-25.33 h3
  text "GM3 - Fabrication Notes" at -19.372,-26.687 h1.7
  text "Copper up to cutout / edge at customer risk /  / V-score lines on GM9" at 35.5,-33.47 h2.3
Board Outline Only:
  the board outline again, w0.2
  text "GM6 - Board Outline Only" at -19.372,-28.186 h1.7
[8] Alignment:
  lines w0.1: 38.5,-12.1 cw(c38.5,-13.1) 39.44,-12.758 ccw(c41.326,-12.093) 39.722,-13.288 ; 38.5,-7.9 ccw(c38.5,-6.9) 39.44,-7.242 cw(c41.326,-7.907) 39.722,-6.712 ; 41.505,-13.969 ccw(c42,-10) 44.278,-13.288 ccw(c42.674,-12.093) 44.56,-12.758 cw(c45.5,-13.1) 45.5,-12.1 45.5,-7.9 cw(c45.5,-6.9) 44.56,-7.242 ccw(c42.674,-7.907) 44.278,-6.712 ccw(c42,-10) 41.546,-6.026 41.505,-13.969
[9] V Score:
  lines w0.2: -17.5,-21 -17.5,51 ; -10.5,-21 -10.5,51 ; -3.5,-21 -3.5,51 ; 3.5,-21 3.5,51 ; 10.5,-21 10.5,51 ; 17.5,-21 17.5,51 ; 24.5,-21 24.5,51 ; 31.5,-21 31.5,51 ; 38.5,-21 38.5,51 ; 45.5,-21 45.5,51
  text "GM9 - V Score" at 10.328,-29.65 h1.7
[11] Board Outline:
  drawing of 330 lines, arcs and shapes, not listed
  text "GM11 - Board Outline + Cutouts" at -19.372,-29.686 h1.7
[15] Top Assy:
  text "GM15 - Top Assy" at -3.872,-23.655 h1.7
[16] Bottom Assy:
  text "GM16 - Bottom Assy" at -3.872,-25.155 h1.7

## Panel: embedded boards
"JacdacBreadboardRingsWasherG 109 oblong.PcbDoc" at -17.5,-14, 2 rows x 2 columns, spacing 30.008 x 28, rotation 0